# EAGLE board one_Mhz (EAGLE 7.7.0)
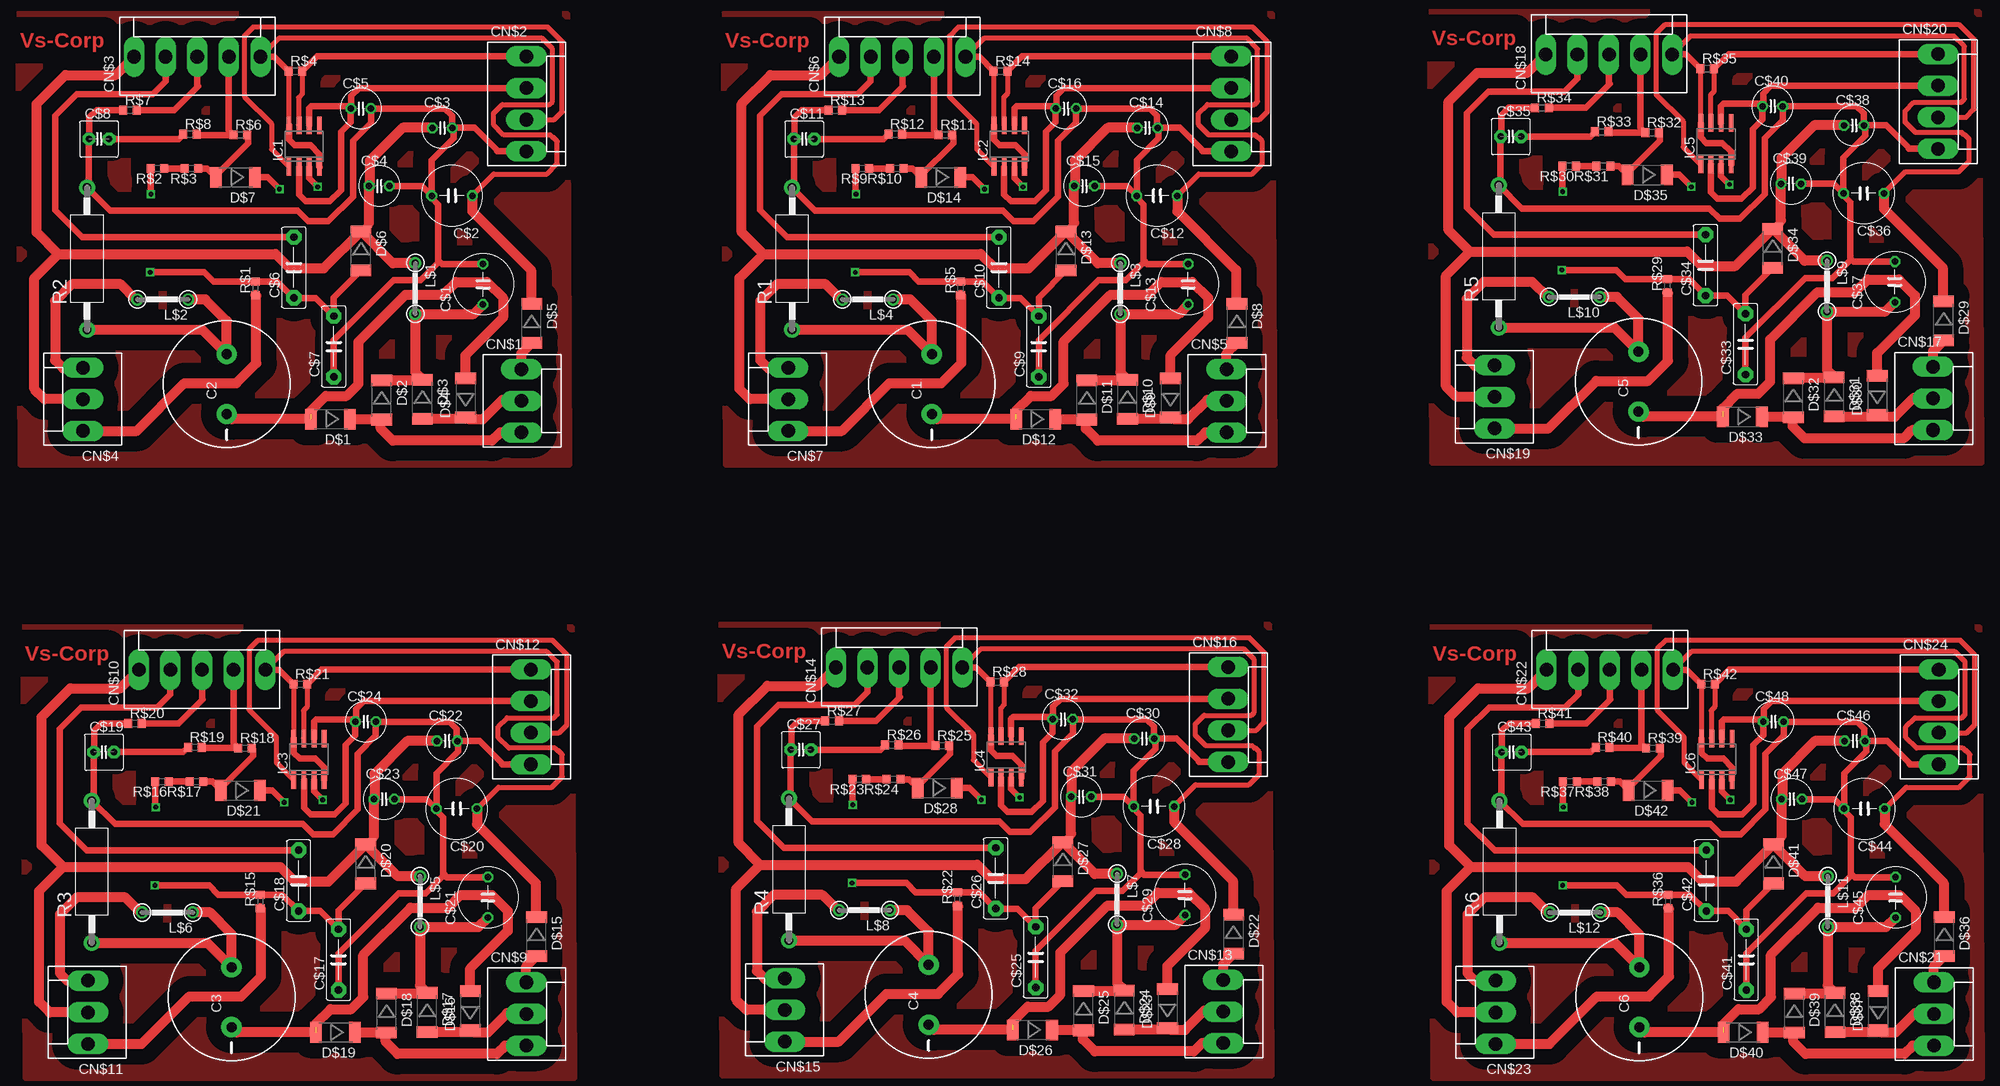
[diagram p0: board, top side]
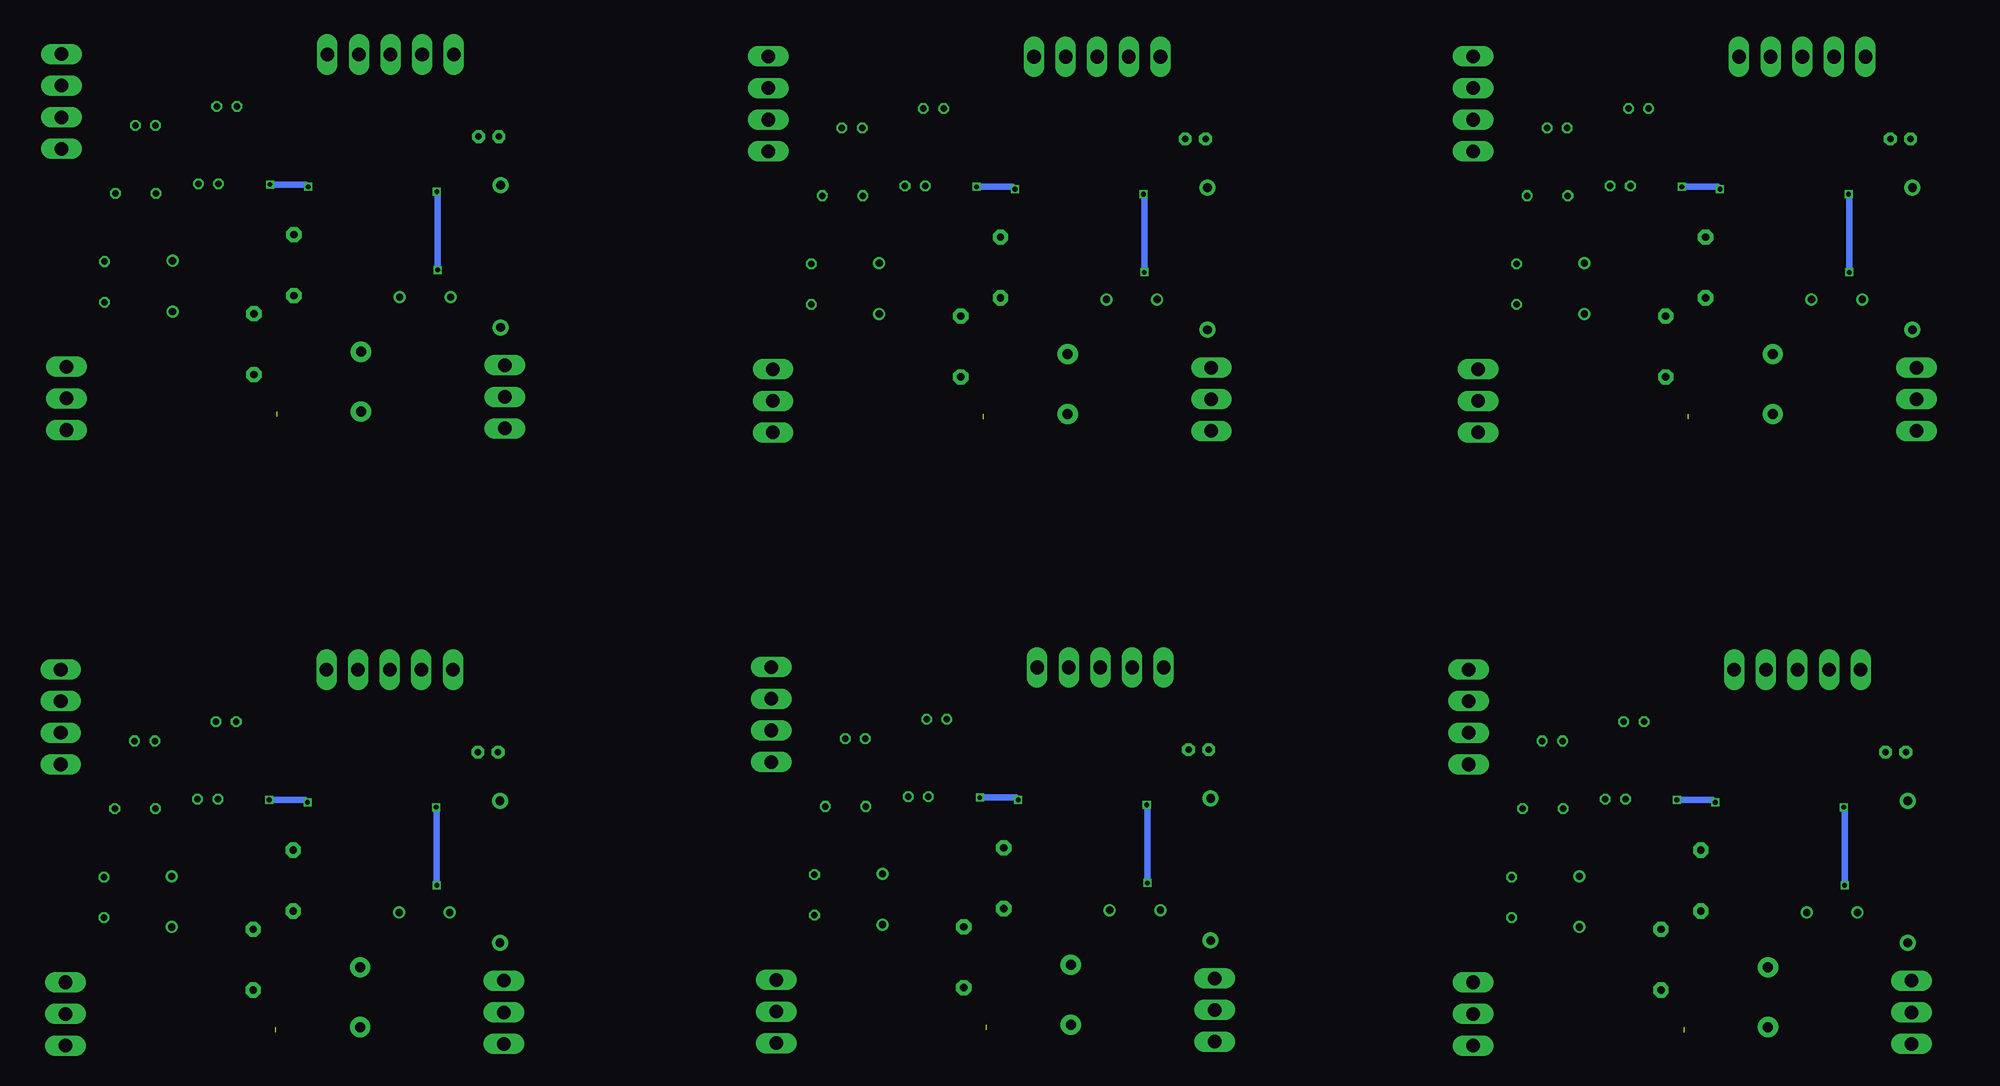
[diagram p1: board, bottom side, seen from below]

No outline drawn. Coordinates in mm, seen from the top.
Copper layers (1*16): Top 0.035mm / dielectric 1.5mm / Bottom 0.035mm
Design rules "default": minimum track width 10mil, minimum drill 24mil, track to track 8mil, track to pad 8mil, pad to pad 8mil, via to via 8mil, smd to smd 8mil, copper to edge 40mil, drill to drill 8mil, minimum pad ring 10mil, minimum via ring 8mil, stop-mask expansion 4mil, vias tented up to drill 0mil, thermal gap 10mil

## Footprints (pad centres in the part's own frame; a part is rotated, then mirrored left to right if it is on the bottom)
SANYO-OSCON_H = drill 1.27 pad 2.54: + 3.75,0; - -3.75,0
C050-075X075 = drill 0.813 octagon: 1 -2.54,0; 2 2.54,0
C025-050X050 = drill 0.813 octagon: 1 -1.27,0; 2 1.27,0
C7.5B3 = drill 0.914 pad 1.905 octagon: 1 -3.81,0; 2 3.81,0
C2.5-5 = drill 0.813 pad 1.6 octagon: 1 -1.27,0; 2 1.27,0
KK-156-3 = drill 1.7 pad 2.184 long: 1 -3.96,0; 2 0,0; 3 3.96,0
KK-156-4 = drill 1.7 pad 2.184 long: 1 -5.94,0; 2 -1.98,0; 3 1.98,0; 4 5.94,0
KK-156-5 = drill 1.7 pad 2.184 long: 1 -7.92,0; 2 -3.96,0; 3 0,0; 4 3.96,0; 5 7.92,0
SOD87 = smd 1.45 x 2.6: 1 -2.445,0; 2 2.445,0
SO08 = smd 0.6 x 2.2: 1 -1.905,-2.6; 2 -0.635,-2.6; 3 0.635,-2.6; 4 1.905,-2.6; 5 1.905,2.6; 6 0.635,2.6; 7 -0.635,2.6; 8 -1.905,2.6
BL03RN2 = drill 0.9 pad 1.5: 1 -2.54,0; 2 3.81,0
AC01 = drill 1.1 pad 2: 1 -8.9,0; 2 8.9,0
R0603 = smd 1 x 1.1: 1 -0.85,0; 2 0.85,0

## Placement (x,y rotation side)
C1  [SANYO-OSCON_H]  115.2,10.7 90 top
C2  [SANYO-OSCON_H]  26.9,10.7 90 top
C3  [SANYO-OSCON_H]  27.5,-66.1 90 top
C4  [SANYO-OSCON_H]  114.8,-65.8 90 top
C5  [SANYO-OSCON_H]  203.7,11 90 top
C6  [SANYO-OSCON_H]  203.8,-66.1 90 top
C$1  [C050-075X075]  59,23.2 90 top
C$2  [C050-075X075]  55.1,34.3 180 top
C$3  [C025-050X050]  53.9,42.8 0 top
C$4  [C025-050X050]  46,35.5 0 top
C$5  [C025-050X050]  43.7,45.2 0 top
C$6  [C7.5B3]  35.3,25.3 90 top
C$7  [C7.5B3]  40.3,15.4 90 top
C$8  [C2.5-5]  10.9,41.4 0 top
C$9  [C7.5B3]  128.6,15.4 90 top
C$10  [C7.5B3]  123.6,25.3 90 top
C$11  [C2.5-5]  99.2,41.4 0 top
C$12  [C050-075X075]  143.4,34.3 180 top
C$13  [C050-075X075]  147.3,23.2 90 top
C$14  [C025-050X050]  142.2,42.8 0 top
C$15  [C025-050X050]  134.3,35.5 0 top
C$16  [C025-050X050]  132,45.2 0 top
C$17  [C7.5B3]  40.9,-61.4 90 top
C$18  [C7.5B3]  35.9,-51.5 90 top
C$19  [C2.5-5]  11.5,-35.4 0 top
C$20  [C050-075X075]  55.7,-42.5 180 top
C$21  [C050-075X075]  59.6,-53.6 90 top
C$22  [C025-050X050]  54.5,-34 0 top
C$23  [C025-050X050]  46.6,-41.3 0 top
C$24  [C025-050X050]  44.3,-31.6 0 top
C$25  [C7.5B3]  128.2,-61.1 90 top
C$26  [C7.5B3]  123.2,-51.2 90 top
C$27  [C2.5-5]  98.8,-35.1 0 top
C$28  [C050-075X075]  143,-42.2 180 top
C$29  [C050-075X075]  146.9,-53.3 90 top
C$30  [C025-050X050]  141.8,-33.7 0 top
C$31  [C025-050X050]  133.9,-41 0 top
C$32  [C025-050X050]  131.6,-31.3 0 top
C$33  [C7.5B3]  217.1,15.7 90 top
C$34  [C7.5B3]  212.1,25.6 90 top
C$35  [C2.5-5]  187.7,41.7 0 top
C$36  [C050-075X075]  231.9,34.6 180 top
C$37  [C050-075X075]  235.8,23.5 90 top
C$38  [C025-050X050]  230.7,43.1 0 top
C$39  [C025-050X050]  222.8,35.8 0 top
C$40  [C025-050X050]  220.5,45.5 0 top
C$41  [C7.5B3]  217.2,-61.4 90 top
C$42  [C7.5B3]  212.2,-51.5 90 top
C$43  [C2.5-5]  187.8,-35.4 0 top
C$44  [C050-075X075]  232,-42.5 180 top
C$45  [C050-075X075]  235.9,-53.6 90 top
C$46  [C025-050X050]  230.8,-34 0 top
C$47  [C025-050X050]  222.9,-41.3 0 top
C$48  [C025-050X050]  220.6,-31.6 0 top
CN$1  [KK-156-3]  63.8,8.6 270 top
CN$2  [KK-156-4]  64.4,45.8 270 top
CN$3  [KK-156-5]  23.2,51.7 0 top
CN$4  [KK-156-3]  8.9,8.8 90 top
CN$5  [KK-156-3]  152.1,8.6 270 top
CN$6  [KK-156-5]  111.5,51.7 0 top
CN$7  [KK-156-3]  97.2,8.8 90 top
CN$8  [KK-156-4]  152.7,45.8 270 top
CN$9  [KK-156-3]  64.4,-68.2 270 top
CN$10  [KK-156-5]  23.8,-25.1 0 top
CN$11  [KK-156-3]  9.5,-68 90 top
CN$12  [KK-156-4]  65,-31 270 top
CN$13  [KK-156-3]  151.7,-67.9 270 top
CN$14  [KK-156-5]  111.1,-24.8 0 top
CN$15  [KK-156-3]  96.8,-67.7 90 top
CN$16  [KK-156-4]  152.3,-30.7 270 top
CN$17  [KK-156-3]  240.6,8.9 270 top
CN$18  [KK-156-5]  200,52 0 top
CN$19  [KK-156-3]  185.7,9.1 90 top
CN$20  [KK-156-4]  241.2,46.1 270 top
CN$21  [KK-156-3]  240.7,-68.2 270 top
CN$22  [KK-156-5]  200.1,-25.1 0 top
CN$23  [KK-156-3]  185.8,-68 90 top
CN$24  [KK-156-4]  241.3,-31 270 top
D$1  [SOD87]  39.9,6.3 180 top
D$2  [SOD87]  46.3,8.7 270 top
D$3  [SOD87]  51.4,8.8 270 top
D$4  [SOD87]  56.8,9 90 top
D$5  [SOD87]  65.1,18.3 270 top
D$6  [SOD87]  43.7,27.4 270 top
D$7  [SOD87]  28,36.6 180 top
D$8  [SOD87]  153.4,18.3 270 top
D$9  [SOD87]  145.1,9 90 top
D$10  [SOD87]  139.7,8.8 270 top
D$11  [SOD87]  134.6,8.7 270 top
D$12  [SOD87]  128.2,6.3 180 top
D$13  [SOD87]  132,27.4 270 top
D$14  [SOD87]  116.3,36.6 180 top
D$15  [SOD87]  65.7,-58.5 270 top
D$16  [SOD87]  57.4,-67.8 90 top
D$17  [SOD87]  52,-68 270 top
D$18  [SOD87]  46.9,-68.1 270 top
D$19  [SOD87]  40.5,-70.5 180 top
D$20  [SOD87]  44.3,-49.4 270 top
D$21  [SOD87]  28.6,-40.2 180 top
D$22  [SOD87]  153,-58.2 270 top
D$23  [SOD87]  144.7,-67.5 90 top
D$24  [SOD87]  139.3,-67.7 270 top
D$25  [SOD87]  134.2,-67.8 270 top
D$26  [SOD87]  127.8,-70.2 180 top
D$27  [SOD87]  131.6,-49.1 270 top
D$28  [SOD87]  115.9,-39.9 180 top
D$29  [SOD87]  241.9,18.6 270 top
D$30  [SOD87]  233.6,9.3 90 top
D$31  [SOD87]  228.2,9.1 270 top
D$32  [SOD87]  223.1,9 270 top
D$33  [SOD87]  216.7,6.6 180 top
D$34  [SOD87]  220.5,27.7 270 top
D$35  [SOD87]  204.8,36.9 180 top
D$36  [SOD87]  242,-58.5 270 top
D$37  [SOD87]  233.7,-67.8 90 top
D$38  [SOD87]  228.3,-68 270 top
D$39  [SOD87]  223.2,-68.1 270 top
D$40  [SOD87]  216.8,-70.5 180 top
D$41  [SOD87]  220.6,-49.4 270 top
D$42  [SOD87]  204.9,-40.2 180 top
IC1  UA555D  [SO08]  36.6,40.5 0 top
IC2  UA555D  [SO08]  124.9,40.5 0 top
IC3  UA555D  [SO08]  37.2,-36.3 0 top
IC4  UA555D  [SO08]  124.5,-36 0 top
IC5  UA555D  [SO08]  213.4,40.8 0 top
IC6  UA555D  [SO08]  213.5,-36.3 0 top
L$1  BL03RN2  [BL03RN2]  50.5,23.3 270 top
L$2  BL03RN2  [BL03RN2]  19.5,21.3 180 top
L$3  BL03RN2  [BL03RN2]  138.8,23.3 270 top
L$4  BL03RN2  [BL03RN2]  107.8,21.3 180 top
L$5  BL03RN2  [BL03RN2]  51.1,-53.5 270 top
L$6  BL03RN2  [BL03RN2]  20.1,-55.5 180 top
L$7  BL03RN2  [BL03RN2]  138.4,-53.2 270 top
L$8  BL03RN2  [BL03RN2]  107.4,-55.2 180 top
L$9  BL03RN2  [BL03RN2]  227.3,23.6 270 top
L$10  BL03RN2  [BL03RN2]  196.3,21.6 180 top
L$11  BL03RN2  [BL03RN2]  227.4,-53.5 270 top
L$12  BL03RN2  [BL03RN2]  196.4,-55.5 180 top
R1  [AC01]  97.7,26.4 90 top
R2  [AC01]  9.4,26.4 90 top
R3  [AC01]  10,-50.4 90 top
R4  [AC01]  97.3,-50.1 90 top
R5  [AC01]  186.2,26.7 90 top
R6  [AC01]  186.3,-50.4 90 top
R$1  [R0603]  30.5,22.7 90 top
R$2  1.5K  [R0603]  18.2,37.7 180 top
R$3  1.5K  [R0603]  22.5,37.7 180 top
R$4  100  [R0603]  35.5,49.9 0 top
R$5  [R0603]  118.8,22.7 90 top
R$6  100  [R0603]  28.6,41.9 0 top
R$7  100  [R0603]  14.8,45 0 top
R$8  100  [R0603]  22.3,42 0 top
R$9  1.5K  [R0603]  106.5,37.7 180 top
R$10  1.5K  [R0603]  110.8,37.7 180 top
R$11  100  [R0603]  116.9,41.9 0 top
R$12  100  [R0603]  110.6,42 0 top
R$13  100  [R0603]  103.1,45 0 top
R$14  100  [R0603]  123.8,49.9 0 top
R$15  [R0603]  31.1,-54.1 90 top
R$16  1.5K  [R0603]  18.8,-39.1 180 top
R$17  1.5K  [R0603]  23.1,-39.1 180 top
R$18  100  [R0603]  29.2,-34.9 0 top
R$19  100  [R0603]  22.9,-34.8 0 top
R$20  100  [R0603]  15.4,-31.8 0 top
R$21  100  [R0603]  36.1,-26.9 0 top
R$22  [R0603]  118.4,-53.8 90 top
R$23  1.5K  [R0603]  106.1,-38.8 180 top
R$24  1.5K  [R0603]  110.4,-38.8 180 top
R$25  100  [R0603]  116.5,-34.6 0 top
R$26  100  [R0603]  110.2,-34.5 0 top
R$27  100  [R0603]  102.7,-31.5 0 top
R$28  100  [R0603]  123.4,-26.6 0 top
R$29  [R0603]  207.3,23 90 top
R$30  1.5K  [R0603]  195,38 180 top
R$31  1.5K  [R0603]  199.3,38 180 top
R$32  100  [R0603]  205.4,42.2 0 top
R$33  100  [R0603]  199.1,42.3 0 top
R$34  100  [R0603]  191.6,45.3 0 top
R$35  100  [R0603]  212.3,50.2 0 top
R$36  [R0603]  207.4,-54.1 90 top
R$37  1.5K  [R0603]  195.1,-39.1 180 top
R$38  1.5K  [R0603]  199.4,-39.1 180 top
R$39  100  [R0603]  205.5,-34.9 0 top
R$40  100  [R0603]  199.2,-34.8 0 top
R$41  100  [R0603]  191.7,-31.8 0 top
R$42  100  [R0603]  212.4,-26.9 0 top

## Library data of the parts
C1-C6 R$1-R$42 = rcl
C$1-C$5 C$12-C$16 C$20-C$24 C$28-C$32 C$36-C$40 C$44-C$48 = resistor
C$6-C$11 C$17-C$19 C$25-C$27 C$33-C$35 C$41-C$43 = capacitor-wima
CN$1-CN$24 = con-molex; OC_FARNELL: unknown; OC_NEWARK: unknown
D$1-D$42 = semicon-smd-ipc
IC1-IC6 = linear
L$1-L$12 = inductors
R1-R6 = resistor-power; OC_FARNELL: unknown; OC_NEWARK: unknown

## Nets
N$1: C$3.1 C$4.1 CN$3.1 CN$4.2 D$6.1 L$1.1
N$2: CN$1.2 D$3.2 D$4.1
N$3: CN$5.2 D$9.1 D$10.2
N$4: CN$5.3 D$11.2 D$12.1
N$5: C1.- D$9.2 D$12.2
N$6: CN$1.3 D$1.1 D$2.2
N$7: C2.- D$1.2 D$4.2
N$8: CN$5.1 D$8.2
N$9: CN$1.1 D$5.2
N$10: R$9.1 R$10.2
N$11: D$14.2 R$10.1 R$11.2
N$12: C$1.2 C$2.2 C$3.2 C$4.2 C$5.2 C$7.1 C$8.1 CN$2.4 R2.2 R$7.1
N$13: R$2.1 R$3.2
N$14: D$7.2 R$3.1 R$6.2
N$15: D$7.1 IC1.3
N$16: CN$3.4 R$6.1 R$8.2
N$17: C$8.2 R$8.1
N$18: D$14.1 IC2.3
N$19: C$5.1 CN$2.2 IC1.2 IC1.6
N$20: CN$3.3 R$7.2
N$21: CN$4.3 L$2.2
N$22: C2.+ L$2.1 R2.1
N$23: CN$6.4 R$11.1 R$12.2
N$24: C$6.2 CN$3.2
N$25: C$11.2 R$12.1
N$26: C$6.1 C$7.2 D$6.2 R$1.2 R$2.2
N$27: C$1.1 D$2.1 D$3.1 L$1.2
N$28: C$2.1 CN$3.5 D$5.1 IC1.4 IC1.8 R$4.1
N$29: CN$6.3 R$13.2
N$30: CN$7.3 L$4.2
N$31: C1.+ L$4.1 R1.1
N$32: C$10.2 CN$6.2
N$33: CN$4.1 R$1.1
N$34: C$9.2 C$10.1 D$13.2 R$5.2 R$9.2
N$35: CN$2.1 IC1.7 R$4.2
N$36: C$9.1 C$11.1 C$12.2 C$13.2 C$14.2 C$15.2 C$16.2 CN$8.4 R1.2 R$13.1
N$37: CN$2.3 IC1.1
N$38: C$16.1 CN$8.2 IC2.2 IC2.6
N$39: C$13.1 D$10.1 D$11.1 L$3.2
N$40: C$12.1 CN$6.5 D$8.1 IC2.4 IC2.8 R$14.1
N$41: CN$8.1 IC2.7 R$14.2
N$42: CN$8.3 IC2.1
N$43: CN$7.1 R$5.1
N$44: C$14.1 C$15.1 CN$6.1 CN$7.2 D$13.1 L$3.1
N$45: CN$9.2 D$16.1 D$17.2
N$46: CN$9.3 D$18.2 D$19.1
N$47: C3.- D$16.2 D$19.2
N$48: CN$9.1 D$15.2
N$49: R$16.1 R$17.2
N$50: D$21.2 R$17.1 R$18.2
N$51: D$21.1 IC3.3
N$52: CN$10.4 R$18.1 R$19.2
N$53: C$19.2 R$19.1
N$54: CN$10.3 R$20.2
N$55: CN$11.3 L$6.2
N$56: C3.+ L$6.1 R3.1
N$57: C$18.2 CN$10.2
N$58: C$17.2 C$18.1 D$20.2 R$15.2 R$16.2
N$59: C$17.1 C$19.1 C$20.2 C$21.2 C$22.2 C$23.2 C$24.2 CN$12.4 R3.2 R$20.1
N$60: C$24.1 CN$12.2 IC3.2 IC3.6
N$61: C$21.1 D$17.1 D$18.1 L$5.2
N$62: C$20.1 CN$10.5 D$15.1 IC3.4 IC3.8 R$21.1
N$63: CN$12.1 IC3.7 R$21.2
N$64: CN$12.3 IC3.1
N$65: CN$11.1 R$15.1
N$66: C$22.1 C$23.1 CN$10.1 CN$11.2 D$20.1 L$5.1
N$67: CN$13.2 D$23.1 D$24.2
N$68: CN$13.3 D$25.2 D$26.1
N$69: C4.- D$23.2 D$26.2
N$70: CN$13.1 D$22.2
N$71: R$23.1 R$24.2
N$72: D$28.2 R$24.1 R$25.2
N$73: D$28.1 IC4.3
N$74: CN$14.4 R$25.1 R$26.2
N$75: C$27.2 R$26.1
N$76: CN$14.3 R$27.2
N$77: CN$15.3 L$8.2
N$78: C4.+ L$8.1 R4.1
N$79: C$26.2 CN$14.2
N$80: C$25.2 C$26.1 D$27.2 R$22.2 R$23.2
N$81: C$25.1 C$27.1 C$28.2 C$29.2 C$30.2 C$31.2 C$32.2 CN$16.4 R4.2 R$27.1
N$82: C$32.1 CN$16.2 IC4.2 IC4.6
N$83: C$29.1 D$24.1 D$25.1 L$7.2
N$84: C$28.1 CN$14.5 D$22.1 IC4.4 IC4.8 R$28.1
N$85: CN$16.1 IC4.7 R$28.2
N$86: CN$16.3 IC4.1
N$87: CN$15.1 R$22.1
N$88: C$30.1 C$31.1 CN$14.1 CN$15.2 D$27.1 L$7.1
N$89: CN$17.2 D$30.1 D$31.2
N$90: CN$17.3 D$32.2 D$33.1
N$91: C5.- D$30.2 D$33.2
N$92: CN$17.1 D$29.2
N$93: R$30.1 R$31.2
N$94: D$35.2 R$31.1 R$32.2
N$95: D$35.1 IC5.3
N$96: CN$18.4 R$32.1 R$33.2
N$97: C$35.2 R$33.1
N$98: CN$18.3 R$34.2
N$99: CN$19.3 L$10.2
N$100: C5.+ L$10.1 R5.1
N$101: C$34.2 CN$18.2
N$102: C$33.2 C$34.1 D$34.2 R$29.2 R$30.2
N$103: C$33.1 C$35.1 C$36.2 C$37.2 C$38.2 C$39.2 C$40.2 CN$20.4 R5.2 R$34.1
N$104: C$40.1 CN$20.2 IC5.2 IC5.6
N$105: C$37.1 D$31.1 D$32.1 L$9.2
N$106: C$36.1 CN$18.5 D$29.1 IC5.4 IC5.8 R$35.1
N$107: CN$20.1 IC5.7 R$35.2
N$108: CN$20.3 IC5.1
N$109: CN$19.1 R$29.1
N$110: C$38.1 C$39.1 CN$18.1 CN$19.2 D$34.1 L$9.1
N$111: CN$21.2 D$37.1 D$38.2
N$112: CN$21.3 D$39.2 D$40.1
N$113: C6.- D$37.2 D$40.2
N$114: CN$21.1 D$36.2
N$115: R$37.1 R$38.2
N$116: D$42.2 R$38.1 R$39.2
N$117: D$42.1 IC6.3
N$118: CN$22.4 R$39.1 R$40.2
N$119: C$43.2 R$40.1
N$120: CN$22.3 R$41.2
N$121: CN$23.3 L$12.2
N$122: C6.+ L$12.1 R6.1
N$123: C$42.2 CN$22.2
N$124: C$41.2 C$42.1 D$41.2 R$36.2 R$37.2
N$125: C$41.1 C$43.1 C$44.2 C$45.2 C$46.2 C$47.2 C$48.2 CN$24.4 R6.2 R$41.1
N$126: C$48.1 CN$24.2 IC6.2 IC6.6
N$127: C$45.1 D$38.1 D$39.1 L$11.2
N$128: C$44.1 CN$22.5 D$36.1 IC6.4 IC6.8 R$42.1
N$129: CN$24.1 IC6.7 R$42.2
N$130: CN$24.3 IC6.1
N$131: CN$23.1 R$36.1
N$132: C$46.1 C$47.1 CN$22.1 CN$23.2 D$41.1 L$11.1

## Tracks (layer width: path | path; a pad name or v marks a point on that pad's centre or on a via)
N$1
  Top 0.813: D$6.1 44.73,30.88 44.73,30.51
  Top 1.27: CN$4.2 4.1,8.8 2.8,10.1 2.8,24 5.8,27 | 5.8,27 3.1,29.7 3.1,45.8 6.7,49.4 12.98,49.4 CN$3.1 | 5.8,27 33,27 34.8,25.2 39.05,25.2 D$6.1 47.7,25.84 L$1.1 | 44.73,30.88 C$4.1 44.8,35.57 44.8,38.7 48.9,42.8 C$3.1
N$2
  Top 0.813: 57.24,6.36 57.3,6.3 57.05,6.3 D$4.1
  Top 1.27: D$3.2 57.24,6.36 | 57.3,6.3 59,6.3 61.4,8.7 63.7,8.7 CN$1.2
N$3
  Top 0.813: 145.54,6.36 145.6,6.3 145.35,6.3 D$9.1
  Top 1.27: D$10.2 145.54,6.36 | 145.6,6.3 147.3,6.3 149.7,8.7 152,8.7 CN$5.2
N$4
  Top 1.27: D$12.1 134.56,6.3 D$11.2 134.5,6.16 134.5,5.1 136,3.6 148.4,3.6 149.44,4.64 CN$5.3
N$5  (1 unrouted)
  Top 1.27: D$9.2 145.1,14.3 149.8,19 149.8,21.5 147.8,23.5 143.9,23.5 142.3,21.9 137.6,21.9 131.7,16 131.7,10.7 130.2,9.2 127.6,9.2 125.75,7.36 125.75,6.95 | D$12.2 115.85,6.3 C1.-
N$6
  Top 1.27: D$1.1 46.26,6.3 D$2.2 46.2,6.16 46.2,5.1 47.7,3.6 60.1,3.6 61.14,4.64 CN$1.3
N$7  (1 unrouted)
  Top 1.27: D$4.2 56.8,14.3 61.5,19 61.5,21.5 59.5,23.5 55.6,23.5 54,21.9 49.3,21.9 43.4,16 43.4,10.7 41.9,9.2 39.3,9.2 37.45,7.36 37.45,6.95 | D$1.2 27.55,6.3 C2.-
N$8
  Top 1.27: CN$5.1 152.1,14.55 D$8.2
N$9
  Top 1.27: CN$1.1 63.8,14.55 D$5.2
N$10
  Top 0.813: R$10.2 R$9.1
N$11
  Top 0.813: R$11.2 117.9,41.75 117.9,40.9 113.86,36.85 D$14.2 112.75,37.7 R$10.1
N$12
  Top 0.813: R$7.1 10.6,45 9.7,44.1 9.7,41.47 C$8.1 9.63,35.53 R2.2 12.3,32.4 35.8,32.4 37.1,31.1 39.6,31.1 42.7,34.2 42.7,41.2 44.97,43.47 C$5.2 54.2,45.2 55.1,44.3 55.1,42.87 C$3.2 | CN$2.4 60.9,39.86 | 60.9,39.86 60.76,39.86 | C$3.2 57.96,42.8 60.9,39.86 | C$4.2 51.36,35.5 C$2.2 | C$2.2 52.56,34.04 53.4,33.2 53.4,26.2 | C$2.2 52.56,38.76 55.3,41.5 55.3,42.67 C$3.2 | C$7.1 40.3,16.2 47.8,23.7 51.2,23.7 53.4,25.9 53.4,26.2 | C$1.2 53.86,25.74 53.4,26.2
N$13
  Top 0.813: R$3.2 R$2.1
N$14
  Top 0.813: R$6.2 29.6,41.75 29.6,40.9 25.55,36.85 D$7.2 24.45,37.7 R$3.1
N$15  (via drill 0.6)
  Top 0.813: IC1.3 37.23,36.47 v38.3,35.4 | D$7.1 32,36.6 v33.5,35.1
  Bottom 0.813: v38.3,35.4 33.8,35.4 v33.5,35.1
N$16
  Top 0.813: R$8.2 23.25,41.9 R$6.1 27.16,42.49 CN$3.4
N$17
  Top 0.813: C$8.2 20.85,41.4 R$8.1
N$18  (via drill 0.6)
  Top 0.813: IC2.3 125.53,36.47 v126.6,35.4 | D$14.1 120.3,36.6 v121.8,35.1
  Bottom 0.813: v126.6,35.4 122.1,35.4 v121.8,35.1
N$19
  Top 0.813: IC1.6 37.23,45.23 37.5,45.5 42.13,45.5 C$5.1 | CN$2.2 43.48,47.78 42.5,46.8 42.5,45.27 C$5.1 | IC1.2 35.97,34.44 36.8,33.6 39.8,33.6 41.2,35 41.2,42.3 42.4,43.5 42.4,45.17 C$5.1
N$20
  Top 0.813: R$7.2 20.3,45 23.3,48 23.2,48.1 CN$3.3
N$21
  Top 0.813: 15.59,21.2 L$2.2
  Top 1.27: 15.59,21.2 15.59,21.21 13.6,23.2 7.5,23.2 5.4,21.1 5.4,13.7 6.4,12.7 8.84,12.7 CN$4.3
N$22
  Top 1.27: L$2.1 24.2,21.3 26.9,18.6 C2.+ 23.85,17.5 R2.1
N$23
  Top 0.813: R$12.2 111.55,41.9 R$11.1 115.46,42.49 CN$6.4
N$24
  Top 0.813: CN$3.2 19.24,48.64 17.6,47 8.1,47 5.4,44.3 5.4,32.5 8.79,29.11 C$6.2
N$25
  Top 0.813: C$11.2 109.15,41.4 R$12.1
N$26  (via drill 0.6)
  Top 0.813: D$6.2 40.3,21.55 C$7.2 38.02,21.49 C$6.1 33.24,23.55 R$1.2 25.25,23.55 24.1,24.7 v17.3,24.7 | R$2.2 17.35,34.55 v17.4,34.5
  Bottom 0.813: v17.3,24.7 17.3,34.4 v17.4,34.5
N$27
  Top 0.813: 51.3,11.14 D$3.1
  Top 1.27: 51.3,11.14 D$2.1 | D$3.1 50.5,12.14 L$1.2 57.83,19.49 C$1.1
N$28
  Top 0.61: CN$3.5 33.42,54 66.4,54 67.7,52.7 67.7,46.1 67.3,45.7 61.4,45.7 60.3,44.6 60.3,43.2 61.6,41.9 67.4,41.9 67.7,41.6 67.8,41.6 68.3,41.1 68.3,38.3 67,37 60.34,37 C$2.1 | R$4.1 34.65,43.15 IC1.8
  Top 0.813: CN$3.5 32.85,51.7 R$4.1 | IC1.8 34.7,41.3 35.4,40.6 37.4,40.6 38.5,39.5 IC1.4
  Top 1.27: C$2.1 57.64,32.36 65,25 65,20.84 D$5.1
N$29
  Top 0.813: R$13.2 108.6,45 111.6,48 111.5,48.1 CN$6.3
N$30
  Top 0.813: 103.89,21.2 L$4.2
  Top 1.27: 103.89,21.2 103.89,21.21 101.9,23.2 95.8,23.2 93.7,21.1 93.7,13.7 94.7,12.7 97.14,12.7 CN$7.3
N$31
  Top 1.27: L$4.1 112.5,21.3 115.2,18.6 C1.+ 112.15,17.5 R1.1
N$32
  Top 0.813: CN$6.2 107.54,48.64 105.9,47 96.4,47 93.7,44.3 93.7,32.5 97.09,29.11 C$10.2
N$33
  Top 1.27: CN$4.1 15.64,4.84 21.6,10.8 28.1,10.8 30.6,13.3 30.6,21.75 R$1.1
N$34  (via drill 0.6)
  Top 0.813: D$13.2 128.6,21.55 C$9.2 126.32,21.49 C$10.1 121.54,23.55 R$5.2 113.55,23.55 112.4,24.7 v105.6,24.7 | R$9.2 105.65,34.55 v105.7,34.5
  Bottom 0.813: v105.6,24.7 105.6,34.4 v105.7,34.5
N$35
  Top 0.61: R$4.2 36.35,47.05 35.9,46.6 35.9,43.16 IC1.7
  Top 0.813: CN$2.1 38.19,51.74 R$4.2
N$36
  Top 0.813: R$13.1 98.9,45 98,44.1 98,41.47 C$11.1 97.93,35.53 R1.2 100.6,32.4 124.1,32.4 125.4,31.1 127.9,31.1 131,34.2 131,41.2 133.27,43.47 C$16.2 142.5,45.2 143.4,44.3 143.4,42.87 C$14.2 | CN$8.4 149.2,39.86 | 149.2,39.86 149.06,39.86 | C$14.2 146.26,42.8 149.2,39.86 | C$15.2 139.66,35.5 C$12.2 | C$12.2 140.86,34.04 141.7,33.2 141.7,26.2 | C$12.2 140.86,38.76 143.6,41.5 143.6,42.67 C$14.2 | C$9.1 128.6,16.2 136.1,23.7 139.5,23.7 141.7,25.9 141.7,26.2 | C$13.2 142.16,25.74 141.7,26.2
N$37
  Top 0.61: CN$2.3 67.92,43.82 68.9,44.8 68.9,53.6 67.1,55.4 30.2,55.4 29.1,54.3 29.1,46.7 32.5,43.3 32.5,40.09 IC1.1
N$38
  Top 0.813: IC2.6 125.53,45.23 125.8,45.5 130.43,45.5 C$16.1 | CN$8.2 131.78,47.78 130.8,46.8 130.8,45.27 C$16.1 | IC2.2 124.27,34.44 125.1,33.6 128.1,33.6 129.5,35 129.5,42.3 130.7,43.5 130.7,45.17 C$16.1
N$39
  Top 0.813: 139.6,11.14 D$10.1
  Top 1.27: 139.6,11.14 D$11.1 | D$10.1 138.8,12.14 L$3.2 146.13,19.49 C$13.1
N$40
  Top 0.61: CN$6.5 121.72,54 154.7,54 156,52.7 156,46.1 155.6,45.7 149.7,45.7 148.6,44.6 148.6,43.2 149.9,41.9 155.7,41.9 156,41.6 156.1,41.6 156.6,41.1 156.6,38.3 155.3,37 148.64,37 C$12.1 | R$14.1 122.95,43.15 IC2.8
  Top 0.813: CN$6.5 121.15,51.7 R$14.1 | IC2.8 123,41.3 123.7,40.6 125.7,40.6 126.8,39.5 IC2.4
  Top 1.27: C$12.1 145.94,32.36 153.3,25 153.3,20.84 D$8.1
N$41
  Top 0.61: R$14.2 124.65,47.05 124.2,46.6 124.2,43.16 IC2.7
  Top 0.813: CN$8.1 126.49,51.74 R$14.2
N$42
  Top 0.61: CN$8.3 156.22,43.82 157.2,44.8 157.2,53.6 155.4,55.4 118.5,55.4 117.4,54.3 117.4,46.7 120.8,43.3 120.8,40.09 IC2.1
N$43
  Top 1.27: CN$7.1 103.94,4.84 109.9,10.8 116.4,10.8 118.9,13.3 118.9,21.75 R$5.1
N$44
  Top 0.813: D$13.1 133.03,30.88 133.03,30.51
  Top 1.27: CN$7.2 92.4,8.8 91.1,10.1 91.1,24 94.1,27 | 94.1,27 91.4,29.7 91.4,45.8 95,49.4 101.28,49.4 CN$6.1 | 94.1,27 121.3,27 123.1,25.2 127.36,25.2 D$13.1 136,25.84 L$3.1 | 133.03,30.88 C$15.1 133.1,35.57 133.1,38.7 137.2,42.8 C$14.1
N$45
  Top 0.813: 57.84,-70.44 57.9,-70.5 57.66,-70.5 D$16.1
  Top 1.27: D$17.2 57.84,-70.44 | 57.9,-70.5 59.6,-70.5 62,-68.1 64.3,-68.1 CN$9.2
N$46
  Top 1.27: D$19.1 46.85,-70.5 D$18.2 46.8,-70.64 46.8,-71.7 48.3,-73.2 60.7,-73.2 61.74,-72.16 CN$9.3
N$47  (1 unrouted)
  Top 1.27: D$16.2 57.4,-62.5 62.1,-57.8 62.1,-55.3 60.1,-53.3 56.2,-53.3 54.6,-54.9 49.9,-54.9 44,-60.8 44,-66.1 42.5,-67.6 39.9,-67.6 38.05,-69.44 38.05,-69.85 | D$19.2 28.15,-70.5 C3.-
N$48
  Top 1.27: CN$9.1 64.4,-62.24 D$15.2
N$49
  Top 0.813: R$17.2 R$16.1
N$50
  Top 0.813: R$18.2 30.2,-35.05 30.2,-35.9 26.16,-39.95 D$21.2 25.05,-39.1 R$17.1
N$51  (via drill 0.6)
  Top 0.813: IC3.3 37.84,-40.34 v38.9,-41.4 | D$21.1 32.6,-40.2 v34.1,-41.7
  Bottom 0.813: v38.9,-41.4 34.4,-41.4 v34.1,-41.7
N$52
  Top 0.813: R$19.2 23.85,-34.9 R$18.1 27.76,-34.31 CN$10.4
N$53
  Top 0.813: C$19.2 21.45,-35.4 R$19.1
N$54
  Top 0.813: R$20.2 20.9,-31.8 23.9,-28.8 23.8,-28.7 CN$10.3
N$55
  Top 0.813: 16.19,-55.6 L$6.2
  Top 1.27: 16.19,-55.6 16.19,-55.59 14.2,-53.6 8.1,-53.6 6,-55.7 6,-63.1 7,-64.1 9.44,-64.1 CN$11.3
N$56
  Top 1.27: L$6.1 24.8,-55.5 27.5,-58.2 C3.+ 24.45,-59.3 R3.1
N$57
  Top 0.813: CN$10.2 19.84,-28.16 18.2,-29.8 8.7,-29.8 6,-32.5 6,-44.3 9.39,-47.69 C$18.2
N$58  (via drill 0.6)
  Top 0.813: D$20.2 40.9,-55.24 C$17.2 38.62,-55.31 C$18.1 33.84,-53.25 R$15.2 25.85,-53.25 24.7,-52.1 v17.9,-52.1 | R$16.2 17.95,-42.25 v18,-42.3
  Bottom 0.813: v17.9,-52.1 17.9,-42.4 v18,-42.3
N$59
  Top 0.813: R$20.1 11.2,-31.8 10.3,-32.7 10.3,-35.33 C$19.1 10.23,-41.27 R3.2 12.9,-44.4 36.4,-44.4 37.7,-45.7 40.2,-45.7 43.3,-42.6 43.3,-35.6 45.57,-33.33 C$24.2 54.8,-31.6 55.7,-32.5 55.7,-33.93 C$22.2 | CN$12.4 61.5,-36.94 | 61.5,-36.94 61.36,-36.94 | C$22.2 58.56,-34 61.5,-36.94 | C$23.2 51.96,-41.3 C$20.2 | C$20.2 53.16,-42.76 54,-43.6 54,-50.6 | C$20.2 53.16,-38.04 55.9,-35.3 55.9,-34.13 C$22.2 | C$17.1 40.9,-60.6 48.4,-53.1 51.8,-53.1 54,-50.9 54,-50.6 | C$21.2 54.46,-51.06 54,-50.6
N$60
  Top 0.813: IC3.6 37.84,-31.57 38.1,-31.3 42.73,-31.3 C$24.1 | CN$12.2 44.08,-29.02 43.1,-30 43.1,-31.53 C$24.1 | IC3.2 36.56,-42.37 37.4,-43.2 40.4,-43.2 41.8,-41.8 41.8,-34.5 43,-33.3 43,-31.63 C$24.1
N$61
  Top 0.813: 51.9,-65.66 D$17.1
  Top 1.27: 51.9,-65.66 D$18.1 | D$17.1 51.1,-64.66 L$5.2 58.43,-57.31 C$21.1
N$62
  Top 0.61: CN$10.5 34.02,-22.8 67,-22.8 68.3,-24.1 68.3,-30.7 67.9,-31.1 62,-31.1 60.9,-32.2 60.9,-33.6 62.2,-34.9 68,-34.9 68.3,-35.2 68.4,-35.2 68.9,-35.7 68.9,-38.5 67.6,-39.8 60.94,-39.8 C$20.1 | R$21.1 35.25,-33.66 IC3.8
  Top 0.813: CN$10.5 33.45,-25.1 R$21.1 | IC3.8 35.3,-35.49 36,-36.2 38,-36.2 39.1,-37.3 IC3.4
  Top 1.27: C$20.1 58.24,-44.44 65.6,-51.8 65.6,-55.95 D$15.1
N$63
  Top 0.61: R$21.2 36.95,-29.75 36.5,-30.2 36.5,-33.63 IC3.7
  Top 0.813: CN$12.1 38.79,-25.06 R$21.2
N$64
  Top 0.61: CN$12.3 68.52,-32.98 69.5,-32 69.5,-23.2 67.7,-21.4 30.8,-21.4 29.7,-22.5 29.7,-30.1 33.1,-33.5 33.1,-36.7 IC3.1
N$65
  Top 1.27: CN$11.1 16.24,-71.96 22.2,-66 28.7,-66 31.2,-63.5 31.2,-55.05 R$15.1
N$66
  Top 0.813: D$20.1 45.33,-45.92 45.33,-46.29
  Top 1.27: CN$11.2 4.7,-68 3.4,-66.7 3.4,-52.8 6.4,-49.8 | 6.4,-49.8 3.7,-47.1 3.7,-31 7.3,-27.4 13.58,-27.4 CN$10.1 | 6.4,-49.8 33.6,-49.8 35.4,-51.6 39.66,-51.6 D$20.1 48.3,-50.96 L$5.1 | 45.33,-45.92 C$23.1 45.4,-41.23 45.4,-38.1 49.5,-34 C$22.1
N$67
  Top 0.813: 145.15,-70.14 145.2,-70.2 144.96,-70.2 D$23.1
  Top 1.27: D$24.2 145.15,-70.14 | 145.2,-70.2 146.9,-70.2 149.3,-67.8 151.6,-67.8 CN$13.2
N$68
  Top 1.27: D$26.1 134.16,-70.2 D$25.2 134.1,-70.34 134.1,-71.4 135.6,-72.9 148,-72.9 149.04,-71.86 CN$13.3
N$69  (1 unrouted)
  Top 1.27: D$23.2 144.7,-62.2 149.4,-57.5 149.4,-55 147.4,-53 143.5,-53 141.9,-54.6 137.2,-54.6 131.3,-60.5 131.3,-65.8 129.8,-67.3 127.2,-67.3 125.36,-69.14 125.36,-69.55 | D$26.2 115.45,-70.2 C4.-
N$70
  Top 1.27: CN$13.1 151.7,-61.95 D$22.2
N$71
  Top 0.813: R$24.2 R$23.1
N$72
  Top 0.813: R$25.2 117.5,-34.75 117.5,-35.6 113.45,-39.65 D$28.2 112.36,-38.8 R$24.1
N$73  (via drill 0.6)
  Top 0.813: IC4.3 125.14,-40.03 v126.2,-41.1 | D$28.1 119.9,-39.9 v121.4,-41.4
  Bottom 0.813: v126.2,-41.1 121.7,-41.1 v121.4,-41.4
N$74
  Top 0.813: R$26.2 111.15,-34.6 R$25.1 115.06,-34.01 CN$14.4
N$75
  Top 0.813: C$27.2 108.75,-35.1 R$26.1
N$76
  Top 0.813: R$27.2 108.2,-31.5 111.2,-28.5 111.1,-28.4 CN$14.3
N$77
  Top 0.813: 103.49,-55.3 L$8.2
  Top 1.27: 103.49,-55.3 103.49,-55.29 101.5,-53.3 95.4,-53.3 93.3,-55.4 93.3,-62.8 94.3,-63.8 96.74,-63.8 CN$15.3
N$78
  Top 1.27: L$8.1 112.1,-55.2 114.8,-57.9 C4.+ 111.75,-59 R4.1
N$79
  Top 0.813: CN$14.2 107.14,-27.86 105.5,-29.5 96,-29.5 93.3,-32.2 93.3,-44 96.69,-47.39 C$26.2
N$80  (via drill 0.6)
  Top 0.813: D$27.2 128.2,-54.95 C$25.2 125.92,-55.01 C$26.1 121.14,-52.95 R$22.2 113.15,-52.95 112,-51.8 v105.2,-51.8 | R$23.2 105.25,-41.95 v105.3,-42
  Bottom 0.813: v105.2,-51.8 105.2,-42.1 v105.3,-42
N$81
  Top 0.813: R$27.1 98.5,-31.5 97.6,-32.4 97.6,-35.03 C$27.1 97.53,-40.97 R4.2 100.2,-44.1 123.7,-44.1 125,-45.4 127.5,-45.4 130.6,-42.3 130.6,-35.3 132.87,-33.03 C$32.2 142.1,-31.3 143,-32.2 143,-33.63 C$30.2 | CN$16.4 148.8,-36.64 | 148.8,-36.64 148.66,-36.64 | C$30.2 145.86,-33.7 148.8,-36.64 | C$31.2 139.26,-41 C$28.2 | C$28.2 140.46,-42.46 141.3,-43.3 141.3,-50.3 | C$28.2 140.46,-37.74 143.2,-35 143.2,-33.83 C$30.2 | C$25.1 128.2,-60.3 135.7,-52.8 139.1,-52.8 141.3,-50.6 141.3,-50.3 | C$29.2 141.76,-50.76 141.3,-50.3
N$82
  Top 0.813: IC4.6 125.14,-31.27 125.4,-31 130.03,-31 C$32.1 | CN$16.2 131.38,-28.72 130.4,-29.7 130.4,-31.23 C$32.1 | IC4.2 123.86,-42.06 124.7,-42.9 127.7,-42.9 129.1,-41.5 129.1,-34.2 130.3,-33 130.3,-31.33 C$32.1
N$83
  Top 0.813: 139.2,-65.36 D$24.1
  Top 1.27: 139.2,-65.36 D$25.1 | D$24.1 138.4,-64.36 L$7.2 145.73,-57.01 C$29.1
N$84
  Top 0.61: CN$14.5 121.32,-22.5 154.3,-22.5 155.6,-23.8 155.6,-30.4 155.2,-30.8 149.3,-30.8 148.2,-31.9 148.2,-33.3 149.5,-34.6 155.3,-34.6 155.6,-34.9 155.7,-34.9 156.2,-35.4 156.2,-38.2 154.9,-39.5 148.24,-39.5 C$28.1 | R$28.1 122.55,-33.35 IC4.8
  Top 0.813: CN$14.5 120.75,-24.8 R$28.1 | IC4.8 122.59,-35.2 123.3,-35.9 125.3,-35.9 126.4,-37 IC4.4
  Top 1.27: C$28.1 145.54,-44.14 152.9,-51.5 152.9,-55.66 D$22.1
N$85
  Top 0.61: R$28.2 124.25,-29.45 123.8,-29.9 123.8,-33.34 IC4.7
  Top 0.813: CN$16.1 126.09,-24.76 R$28.2
N$86
  Top 0.61: CN$16.3 155.82,-32.68 156.8,-31.7 156.8,-22.9 155,-21.1 118.1,-21.1 117,-22.2 117,-29.8 120.4,-33.2 120.4,-36.41 IC4.1
N$87
  Top 1.27: CN$15.1 103.54,-71.66 109.5,-65.7 116,-65.7 118.5,-63.2 118.5,-54.75 R$22.1
N$88
  Top 0.813: D$27.1 132.63,-45.62 132.63,-45.99
  Top 1.27: CN$15.2 92,-67.7 90.7,-66.4 90.7,-52.5 93.7,-49.5 | 93.7,-49.5 91,-46.8 91,-30.7 94.6,-27.1 100.88,-27.1 CN$14.1 | 93.7,-49.5 120.9,-49.5 122.7,-51.3 126.95,-51.3 D$27.1 135.6,-50.66 L$7.1 | 132.63,-45.62 C$31.1 132.7,-40.93 132.7,-37.8 136.8,-33.7 C$30.1
N$89
  Top 0.813: 234.04,6.66 234.1,6.6 233.85,6.6 D$30.1
  Top 1.27: D$31.2 234.04,6.66 | 234.1,6.6 235.8,6.6 238.2,9 240.5,9 CN$17.2
N$90
  Top 1.27: D$33.1 223.06,6.6 D$32.2 223,6.46 223,5.4 224.5,3.9 236.9,3.9 237.94,4.94 CN$17.3
N$91  (1 unrouted)
  Top 1.27: D$30.2 233.6,14.6 238.3,19.3 238.3,21.8 236.3,23.8 232.4,23.8 230.8,22.2 226.1,22.2 220.2,16.3 220.2,11 218.7,9.5 216.1,9.5 214.25,7.66 214.25,7.25 | D$33.2 204.35,6.6 C5.-
N$92
  Top 1.27: CN$17.1 240.6,14.86 D$29.2
N$93
  Top 0.813: R$31.2 R$30.1
N$94
  Top 0.813: R$32.2 206.4,42.05 206.4,41.2 202.35,37.16 D$35.2 201.25,38 R$31.1
N$95  (via drill 0.6)
  Top 0.813: IC5.3 214.03,36.77 v215.1,35.7 | D$35.1 208.8,36.9 v210.3,35.4
  Bottom 0.813: v215.1,35.7 210.6,35.7 v210.3,35.4
N$96
  Top 0.813: R$33.2 200.05,42.2 R$32.1 203.96,42.79 CN$18.4
N$97
  Top 0.813: C$35.2 197.65,41.7 R$33.1
N$98
  Top 0.813: R$34.2 197.1,45.3 200.1,48.3 200,48.4 CN$18.3
N$99
  Top 0.813: 192.39,21.5 L$10.2
  Top 1.27: 192.39,21.5 192.39,21.51 190.4,23.5 184.3,23.5 182.2,21.4 182.2,14 183.2,13 185.64,13 CN$19.3
N$100
  Top 1.27: L$10.1 201,21.6 203.7,18.9 C5.+ 200.65,17.8 R5.1
N$101
  Top 0.813: CN$18.2 196.04,48.94 194.4,47.3 184.9,47.3 182.2,44.6 182.2,32.8 185.59,29.41 C$34.2
N$102  (via drill 0.6)
  Top 0.813: D$34.2 217.1,21.86 C$33.2 214.82,21.79 C$34.1 210.04,23.85 R$29.2 202.05,23.85 200.9,25 v194.1,25 | R$30.2 194.15,34.85 v194.2,34.8
  Bottom 0.813: v194.1,25 194.1,34.7 v194.2,34.8
N$103
  Top 0.813: R$34.1 187.4,45.3 186.5,44.4 186.5,41.77 C$35.1 186.43,35.83 R5.2 189.1,32.7 212.6,32.7 213.9,31.4 216.4,31.4 219.5,34.5 219.5,41.5 221.77,43.77 C$40.2 231,45.5 231.9,44.6 231.9,43.17 C$38.2 | CN$20.4 237.7,40.16 | 237.7,40.16 237.56,40.16 | C$38.2 234.76,43.1 237.7,40.16 | C$39.2 228.16,35.8 C$36.2 | C$36.2 229.36,34.34 230.2,33.5 230.2,26.5 | C$36.2 229.36,39.06 232.1,41.8 232.1,42.97 C$38.2 | C$33.1 217.1,16.5 224.6,24 228,24 230.2,26.2 230.2,26.5 | C$37.2 230.66,26.04 230.2,26.5
N$104
  Top 0.813: IC5.6 214.03,45.53 214.3,45.8 218.93,45.8 C$40.1 | CN$20.2 220.28,48.08 219.3,47.1 219.3,45.57 C$40.1 | IC5.2 212.76,34.73 213.6,33.9 216.6,33.9 218,35.3 218,42.6 219.2,43.8 219.2,45.47 C$40.1
N$105
  Top 0.813: 228.1,11.45 D$31.1
  Top 1.27: 228.1,11.45 D$32.1 | D$31.1 227.3,12.45 L$9.2 234.63,19.79 C$37.1
N$106
  Top 0.61: CN$18.5 210.22,54.3 243.2,54.3 244.5,53 244.5,46.4 244.1,46 238.2,46 237.1,44.9 237.1,43.5 238.4,42.2 244.2,42.2 244.5,41.9 244.6,41.9 245.1,41.4 245.1,38.6 243.8,37.3 237.14,37.3 C$36.1 | R$35.1 211.45,43.45 IC5.8
  Top 0.813: CN$18.5 209.65,52 R$35.1 | IC5.8 211.5,41.6 212.2,40.9 214.2,40.9 215.3,39.8 IC5.4
  Top 1.27: C$36.1 234.44,32.66 241.8,25.3 241.8,21.14 D$29.1
N$107
  Top 0.61: R$35.2 213.15,47.35 212.7,46.9 212.7,43.47 IC5.7
  Top 0.813: CN$20.1 214.99,52.04 R$35.2
N$108
  Top 0.61: CN$20.3 244.72,44.12 245.7,45.1 245.7,53.9 243.9,55.7 207,55.7 205.9,54.6 205.9,47 209.3,43.6 209.3,40.4 IC5.1
N$109
  Top 1.27: CN$19.1 192.44,5.14 198.4,11.1 204.9,11.1 207.4,13.6 207.4,22.05 R$29.1
N$110
  Top 0.813: D$34.1 221.53,31.18 221.53,30.81
  Top 1.27: CN$19.2 180.9,9.1 179.6,10.4 179.6,24.3 182.6,27.3 | 182.6,27.3 179.9,30 179.9,46.1 183.5,49.7 189.78,49.7 CN$18.1 | 182.6,27.3 209.8,27.3 211.6,25.5 215.85,25.5 D$34.1 224.5,26.14 L$9.1 | 221.53,31.18 C$39.1 221.6,35.87 221.6,39 225.7,43.1 C$38.1
N$111
  Top 0.813: 234.15,-70.44 234.2,-70.5 233.96,-70.5 D$37.1
  Top 1.27: D$38.2 234.15,-70.44 | 234.2,-70.5 235.9,-70.5 238.3,-68.1 240.6,-68.1 CN$21.2
N$112
  Top 1.27: D$40.1 223.16,-70.5 D$39.2 223.1,-70.64 223.1,-71.7 224.6,-73.2 237,-73.2 238.04,-72.16 CN$21.3
N$113  (1 unrouted)
  Top 1.27: D$37.2 233.7,-62.5 238.4,-57.8 238.4,-55.3 236.4,-53.3 232.5,-53.3 230.9,-54.9 226.2,-54.9 220.3,-60.8 220.3,-66.1 218.8,-67.6 216.2,-67.6 214.35,-69.44 214.35,-69.85 | D$40.2 204.45,-70.5 C6.-
N$114
  Top 1.27: CN$21.1 240.7,-62.24 D$36.2
N$115
  Top 0.813: R$38.2 R$37.1
N$116
  Top 0.813: R$39.2 206.5,-35.05 206.5,-35.9 202.46,-39.95 D$42.2 201.35,-39.1 R$38.1
N$117  (via drill 0.6)
  Top 0.813: IC6.3 214.13,-40.34 v215.2,-41.4 | D$42.1 208.9,-40.2 v210.4,-41.7
  Bottom 0.813: v215.2,-41.4 210.7,-41.4 v210.4,-41.7
N$118
  Top 0.813: R$40.2 200.15,-34.9 R$39.1 204.06,-34.31 CN$22.4
N$119
  Top 0.813: C$43.2 197.75,-35.4 R$40.1
N$120
  Top 0.813: R$41.2 197.2,-31.8 200.2,-28.8 200.1,-28.7 CN$22.3
N$121
  Top 0.813: 192.49,-55.6 L$12.2
  Top 1.27: 192.49,-55.6 192.49,-55.59 190.5,-53.6 184.4,-53.6 182.3,-55.7 182.3,-63.1 183.3,-64.1 185.74,-64.1 CN$23.3
N$122
  Top 1.27: L$12.1 201.1,-55.5 203.8,-58.2 C6.+ 200.75,-59.3 R6.1
N$123
  Top 0.813: CN$22.2 196.14,-28.16 194.5,-29.8 185,-29.8 182.3,-32.5 182.3,-44.3 185.69,-47.69 C$42.2
N$124  (via drill 0.6)
  Top 0.813: D$41.2 217.2,-55.24 C$41.2 214.92,-55.31 C$42.1 210.14,-53.25 R$36.2 202.15,-53.25 201,-52.1 v194.2,-52.1 | R$37.2 194.25,-42.25 v194.3,-42.3
  Bottom 0.813: v194.2,-52.1 194.2,-42.4 v194.3,-42.3
N$125
  Top 0.813: R$41.1 187.5,-31.8 186.6,-32.7 186.6,-35.33 C$43.1 186.53,-41.27 R6.2 189.2,-44.4 212.7,-44.4 214,-45.7 216.5,-45.7 219.6,-42.6 219.6,-35.6 221.87,-33.33 C$48.2 231.1,-31.6 232,-32.5 232,-33.93 C$46.2 | CN$24.4 237.8,-36.94 | 237.8,-36.94 237.66,-36.94 | C$46.2 234.86,-34 237.8,-36.94 | C$47.2 228.26,-41.3 C$44.2 | C$44.2 229.46,-42.76 230.3,-43.6 230.3,-50.6 | C$44.2 229.46,-38.04 232.2,-35.3 232.2,-34.13 C$46.2 | C$41.1 217.2,-60.6 224.7,-53.1 228.1,-53.1 230.3,-50.9 230.3,-50.6 | C$45.2 230.76,-51.06 230.3,-50.6
N$126
  Top 0.813: IC6.6 214.13,-31.57 214.4,-31.3 219.03,-31.3 C$48.1 | CN$24.2 220.38,-29.02 219.4,-30 219.4,-31.53 C$48.1 | IC6.2 212.87,-42.37 213.7,-43.2 216.7,-43.2 218.1,-41.8 218.1,-34.5 219.3,-33.3 219.3,-31.63 C$48.1
N$127
  Top 0.813: 228.2,-65.66 D$38.1
  Top 1.27: 228.2,-65.66 D$39.1 | D$38.1 227.4,-64.66 L$11.2 234.73,-57.31 C$45.1
N$128
  Top 0.61: CN$22.5 210.32,-22.8 243.3,-22.8 244.6,-24.1 244.6,-30.7 244.2,-31.1 238.3,-31.1 237.2,-32.2 237.2,-33.6 238.5,-34.9 244.3,-34.9 244.6,-35.2 244.7,-35.2 245.2,-35.7 245.2,-38.5 243.9,-39.8 237.24,-39.8 C$44.1 | R$42.1 211.55,-33.66 IC6.8
  Top 0.813: CN$22.5 209.75,-25.1 R$42.1 | IC6.8 211.59,-35.49 212.3,-36.2 214.3,-36.2 215.4,-37.3 IC6.4
  Top 1.27: C$44.1 234.54,-44.44 241.9,-51.8 241.9,-55.95 D$36.1
N$129
  Top 0.61: R$42.2 213.25,-29.75 212.8,-30.2 212.8,-33.63 IC6.7
  Top 0.813: CN$24.1 215.09,-25.06 R$42.2
N$130
  Top 0.61: CN$24.3 244.82,-32.98 245.8,-32 245.8,-23.2 244,-21.4 207.1,-21.4 206,-22.5 206,-30.1 209.4,-33.5 209.4,-36.7 IC6.1
N$131
  Top 1.27: CN$23.1 192.54,-71.96 198.5,-66 205,-66 207.5,-63.5 207.5,-55.05 R$36.1
N$132
  Top 0.813: D$41.1 221.63,-45.92 221.63,-46.29
  Top 1.27: CN$23.2 181,-68 179.7,-66.7 179.7,-52.8 182.7,-49.8 | 182.7,-49.8 180,-47.1 180,-31 183.6,-27.4 189.88,-27.4 CN$22.1 | 182.7,-49.8 209.9,-49.8 211.7,-51.6 215.96,-51.6 D$41.1 224.6,-50.96 L$11.1 | 221.63,-45.92 C$47.1 221.7,-41.23 221.7,-38.1 225.8,-34 C$46.1
S$1
  pour Top (isolate 1.93): 0.8,57 69.5,57 69.8,0.6 1.1,0.6
S$2
  pour Top (isolate 1.93): 89.1,57 157.8,57 158.1,0.6 89.4,0.6
S$3
  pour Top (isolate 1.93): 1.4,-19.8 70.1,-19.8 70.4,-76.2 1.7,-76.2
S$4
  pour Top (isolate 1.93): 88.7,-19.5 157.4,-19.5 157.7,-75.9 89,-75.9
S$5
  pour Top (isolate 1.93): 177.6,57.3 246.3,57.3 246.6,0.9 177.9,0.9
S$6
  pour Top (isolate 1.93): 177.7,-19.8 246.4,-19.8 246.7,-76.2 178,-76.2

## Text on the board
Top: Vs-Corp | Vs-Corp | Vs-Corp | Vs-Corp | Vs-Corp | Vs-Corp